# Altium PCB Layout_Power_Supply_V3.PcbDoc
Units mm, origin at the board's own origin, x right, y up, seen from the top; angles counter-clockwise.
Board outline 24.89 x 34.29 mm, 2 copper layers (Top Layer, Bottom Layer); 26 components, 17 nets, 78 pads, 18 vias.
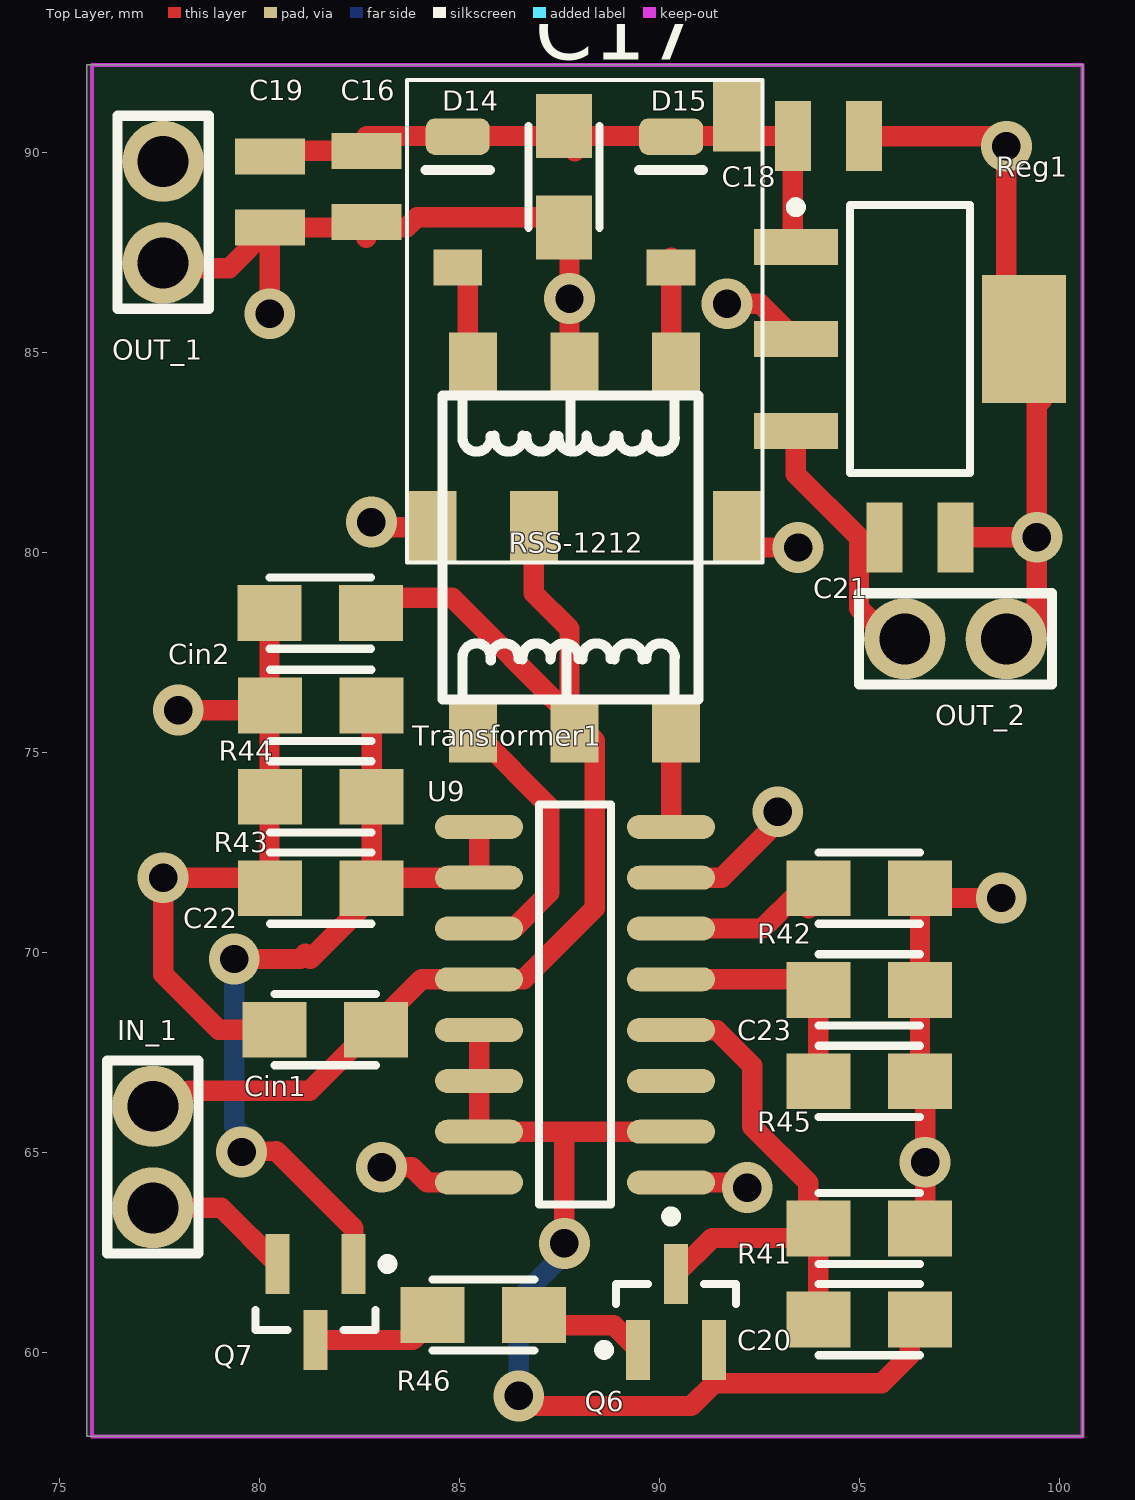
[diagram p0: Top Layer view]
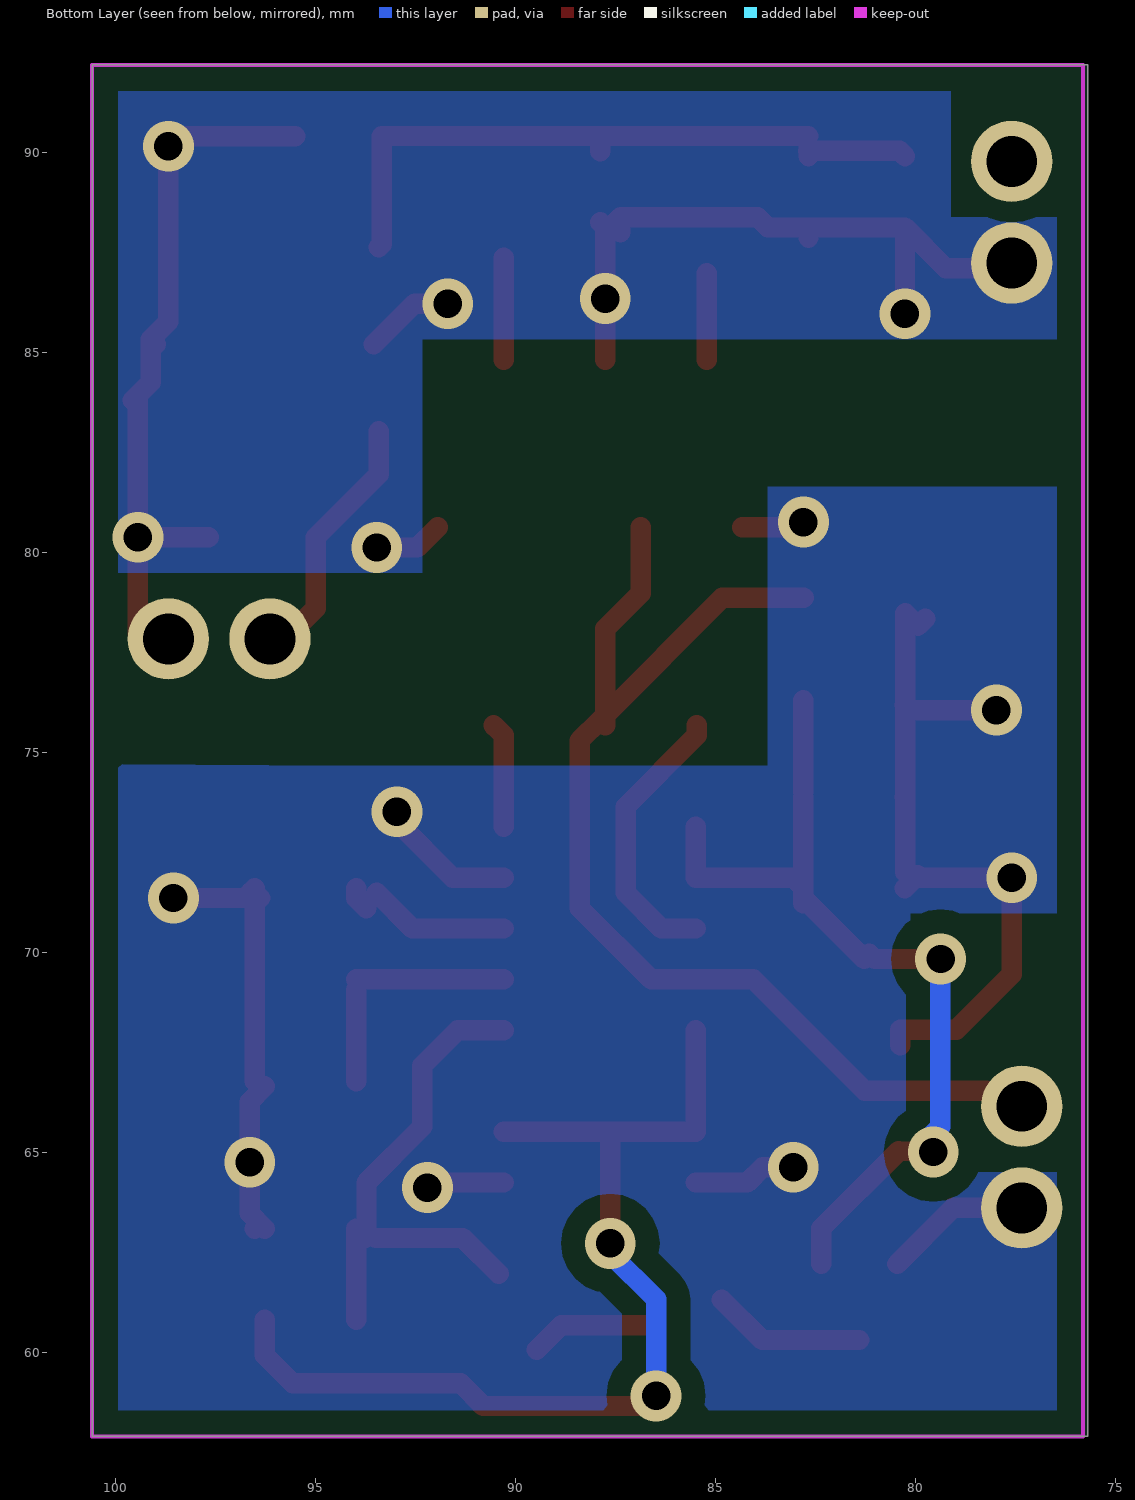
[diagram p1: Bottom Layer view, seen from below]

## Layer stack, top to bottom
Top Solder: solder mask 0.0102, Solder Resist, Dk 3.5
Top Layer: signal copper 0.0356
Dielectric 1: dielectric 0.32, FR-4, Dk 4.8
Bottom Layer: signal copper 0.0356
Bottom Solder: solder mask 0.0102, Solder Resist, Dk 3.5

## Board outline
75.692,57.912 100.584,57.912 100.584,92.202 75.692,92.202

## Design rules (kind name [scope] priority, off if disabled: settings)
Clearance Inversor_test [All] p1: gap=0.254
Clearance [All] p2: gap=0.256 except(0.5: THPad-Poly; 0.6: Track-Poly Via-Poly)
PlaneClearance PlaneClearance_1 [All] p1: clearance=1
PlaneClearance [InNet('GND_IN') And OnLayer('Bottom Layer')] p2: clearance=1
PlaneConnect [All] p1: planeconnectstyle=Direct reliefexpansion=0.508 reliefentries=4 reliefconductorwidth=0.254 reliefairgap=0.254
PolygonConnect [All] p1: connectstyle=Direct reliefconductorwidth=0.254 reliefentries=4 polygonreliefangle="90 Angle" airgapwidth=0.254
RoomDefinition Conectors_IsolatedSupply [InComponentClass('Conectors_IsolatedSupply')] p1: confinementstyle=ConfineIn formatcopy=TRUE lockcomponents=FALSE outline 0,25.654 371.602,25.654 371.602,217.687 0,217.687
RoomDefinition isolatedSupply [InComponentClass('isolatedSupply')] p2: confinementstyle=ConfineIn formatcopy=TRUE lockcomponents=FALSE outline 26.035,26.162 332.994,26.162 332.994,126.873 26.035,126.873
RoutingVias [All] p1: holewidth=0.711 width=1.27 viastyle="Through Hole" minholewidth=0.711 minwidth=1.27 maxholewidth=0.711 maxwidth=1.27
SolderMaskExpansion [All] p1: expansion=0.102
Width [All] p1: maxlimit=0.52 minlimit=0.5 preferedwidth=0.51 minimp=50.000000 maximp=50.000000 favimp=50.000000
28 further rules are at their usual default settings.

## Classes and differential pairs
component class Conectors_IsolatedSupply: IN_1 OUT_1 OUT_2

## Components (designator, comment, footprint, x,y, rotation, side; value= is the part's Value field where it differs from the comment)
C16 "Capacitor_nao_polarizado" "Capacitor SMD - 0806" 82.686,89.161 r270 top
C17 "Capacitor_nao_polarizado" 0805_W 87.63,89.408 r270 top
C18 "Capacitor_nao_polarizado" "Capacitor SMD - 0806" 94.233,90.424 r0 top
C19 "Capacitor_nao_polarizado" "Capacitor SMD - 0806" 80.264,89.028 r270 top
C20 "Cap_0805" 0805_W 95.257,60.824 r180 top
C21 "Capacitor_nao_polarizado" "Capacitor SMD - 0806" 96.52,80.391 r0 top
C22 "Cap_0805" 0805_W 81.534,71.628 r0 top
C23 "Cap_0805" 0805_W 95.243,69.088 r0 top
Cin1 "Cap_0805" 0805_W 81.661,68.072 r180 top
Cin2 "Cap_0805" 0805_W 81.534,78.486 r180 top
D14 "B2-SMD" SOD-123 84.963,88.773 r90 top
D15 "B2-smd" SOD-123 90.297,88.773 r90 top
IN_1 "Header 2" Header2 77.343,63.627 r90 top
OUT_1 "Header 2" Header2 77.597,87.249 r90 top
OUT_2 "Header 2" Header2 98.679,77.851 r180 top
Q6 "BC857" SOT-23-TT3_N 90.424,61.026 r90 top
Q7 "BC847" SOT-23-TT3_N 81.407,61.275 r270 top
R41 "Res_0805" 0805_W 95.257,63.1 r180 top
R42 "Res_0805" 0805_W 95.257,71.609 r180 top
R43 "Res_0805" 0805_W 81.534,73.914 r0 top
R44 "Res_0805" 0805_W 81.534,76.2 r0 top
R45 "Res_0805" 0805_W 95.257,66.783 r180 top
R46 "Res_0805" 0805_W 85.598,60.96 r0 top
Reg1 "LM7805" SOT223 96.266,85.344 r0 top
Transformer1 "WE-PP" Trafo 87.884,80.137 r90 top
U9 "TL494ID" SOIC16_N 87.897,68.707 r180 top

## Footprints (in the part's own frame and the unit in brackets; to place one, negate y for a bottom-side part, rotate by r counter-clockwise, add the part's x,y. Pads: shape width x height; smd on the part's side, far side on the other; paste and mask are expansions set on the pad)
0805_W [mm]
  rect 1.6x1.397 smd: 1(-1.263,-0.009) 2(1.277,-0.009)
  silkscreen extent -1.26,-0.9 1.28,0.88
"Capacitor SMD - 0806" [mm] "0806 - Soldar"
  rect 0.9x1.75 smd: 1(-0.89,0) 2(0.89,0)
  body extent -1.08,-0.67 1.07,0.67, height 0.55
Header2 [mil]
  round 80 hole 50: 1(0,0) 2(100,0)
  silkscreen extent -45,-45 145,45
SOD-123 [mm] "Diodo"
  rect 0.91x1.22 smd: 1(-1.635,0)
  rrect50% 0.91x1.6 smd: 2(1.635,0)
  silkscreen extent 0.8,-0.8 0.8,0.8
SOIC16_N [mm] "SOIC, 16-Leads, Body 9.9x3.9mm, Pitch 1.27mm, IPC Medium Density"
  oval 2.2x0.6 smd: 1(-2.4,4.445) 2(-2.4,3.175) 3(-2.4,1.905) 4(-2.4,0.635) 5(-2.4,-0.635) 6(-2.4,-1.905) 7(-2.4,-3.175) 8(-2.4,-4.445) 9(2.4,-4.445) 10(2.4,-3.175) 11(2.4,-1.905) 12(2.4,-0.635) 13(2.4,0.635) 14(2.4,1.905) 15(2.4,3.175) 16(2.4,4.445)
  silkscreen extent -2.53,-5 0.9,5.42, body extent -2,-5 2,5, height 1.91
SOT223 [mm] "large"
  rect 2.1x0.9 smd: 1(-2.85,0) 2(-2.85,-2.3) 3(-2.85,2.3)
  rect 2.1x3.2 smd: 1(2.85,0)
  silkscreen extent -2.97,-3.35 1.5,3.42, body extent -1.85,-3.35 1.85,3.35, height 1.7
SOT-23-TT3_N [mm] "SOT23, 3-Leads, Body 2.9x1.3mm, Pitch 0.95mm, Lead Span 2.4mm, IPC Medium Density"
  rect 1.5x0.6 smd: 1(-0.95,0.95) 2(-0.95,-0.95) 3(0.95,0)
  silkscreen extent -1.07,-1.5 0.7,1.92, body extent -0.7,-1.5 0.7,1.5, height 1.12
Trafo [mm] "transformador smd TI"
  rect 1.6x1.2 smd: 1(-4.57,2.54) 2(-4.57,0) 3(-4.57,-2.54) 4(4.57,-2.54) 5(4.57,0) 6(4.57,2.54)
  silkscreen extent -3.8,-3.1 3.8,3.3

## Part data
C16 C17 C18 C19 C21: "Capacitor nao polarizado"
C20 C22 C23 Cin1 Cin2: "Capacitor"
D14 D15: library part Schottky, "Diodo Schottky"
IN_1 OUT_1 OUT_2: "Header, 2-Pin"
Q6: "PNP General-purpose Transistor"
Q7: "NPN General-purpose Transistor"
R41 R42 R43 R44 R45 R46: "Resistor"
Transformer1: library part Trafo-TI
U9: "Pulse-Width-Modulation Control Circuit"

## Free pads (board coordinates)
  rect 1.2x1.8 smd: 2(91.948,90.932) 3(91.948,80.645) 4(86.868,80.645) 5(84.328,80.645)

## Via types
v1: diameter 1.27, hole 0.711, Top Layer to Bottom Layer, 18 vias

## Nets (pads, with @x,y where several pads share a name; then routed paths per layer and width w, separated by ;. In a path a pad name is that pad's centre, name@x,y a point inside that pad or via, vN(x,y) a via of type N, cw(c..) or ccw(c..) an arc to the next point about the centre after c; other vN are vias at no path point)
5V_REF: C20.1 Q6.2 U9.2 U9.13 U9.14 U9.15 | length 25
  Top Layer w0.51: U9.13 U9.14 U9.15 87.63,65.532 ; v1(86.487,58.928) 86.487,58.801 86.614,58.674 90.805,58.674 91.374,59.243 95.565,59.243 96.266,59.944 C20.1@96.266,60.833 ; v1@87.63,63.246 87.63,65.532 ; U9.2 87.63,65.532
  Bottom Layer w0.51: v1(86.487,58.928) 86.487,61.341 v1@87.63,62.484
  other v1: 87.63,62.738
+5V_ISO: C21.1 OUT_2.2 Reg1.2 | length 6.9
  Top Layer w0.51: Reg1.2 93.416,81.969 94.994,80.391 94.994,78.615 OUT_2.2@96.266,77.343
CT: C23.1 R45.2 U9.5 | length 6
  Top Layer w0.51: U9.5 C23.1@93.98,69.342 ; R45.2 C23.1
DT_CON: C20.2 Q6.3 R41.2 U9.4 | length 13.1
  Top Layer w0.51: U9.4 91.44,68.072 92.329,67.183 92.329,65.659 93.726,64.262 R41.2@93.726,63.11 ; Q6.3 91.322,62.874 R41.2@93.491,62.874 ; R41.2@93.745,62.874 R41.2 C20.2
FEEDBACK: U9.3
GND_IN: C22.1 C23.2 Cin1.2 Cin2.2 IN_1.1 pad.5 Q7.2 R41.1 R42.1 R43.1 R44.1 R45.1 U9.1 U9.7 U9.16 | length 42.4
  Top Layer w0.51: IN_1.1@77.851,63.627 79.055,63.627 Q7.2 ; v1(77.978,76.073) 80.153,76.073 R44.1@80.257,76.177 ; Cin2.2@79.756,78.359 79.938,78.177 Cin2.2 R44.1@80.257,76.177 ; C22.1@80.257,72.016 R43.1@80.257,73.914 ; C22.1 79.945,71.944 79.883,71.882 v1(77.597,71.882) 77.597,69.469 78.985,68.081 Cin1.2 Cin1.2@80.384,67.698 ; R43.1 80.261,73.914 R43.1@80.257,73.914 ; R44.1 R44.1@80.257,76.177 ; v1(82.804,80.772) 82.931,80.645 pad.5 ; v1(83.058,64.643) 83.82,64.643 84.201,64.262 U9.16 ; U9.1 92.075,64.262 v1(92.202,64.135) ; U9.7 91.567,71.882 92.964,73.279 v1(92.964,73.533) ; R41.1@96.266,63.11 96.647,63.491 v1(96.647,64.77) 96.647,66.285 R45.1@96.266,66.666 ; R42.1@96.384,71.374 R42.1@96.52,71.374 ; R41.1@96.511,63.119 R41.1 ; R45.1 C23.2 R42.1@96.52,71.374 ; R42.1@96.638,71.501 R42.1 R42.1@96.52,71.374 ; v1(98.552,71.374) R42.1@96.52,71.374 ; R43.1@80.257,73.914 R44.1@80.257,76.177
I_FB: C22.2 Q7.1 R43.2 R44.2 U9.9 U9.10 | length 22.5
  Top Layer w0.51: v1(79.375,69.85) 81.026,69.85 81.153,69.977 81.28,69.85 C22.2@82.804,71.374 ; v1(79.558,65.024) 80.422,65.05 82.357,63.114 Q7.1 ; C22.2@82.804,71.247 C22.2@82.804,71.374 ; R43.2 82.811,71.889 C22.2@82.804,71.882 ; R43.2@82.811,74.032 R44.2 R44.2@82.811,76.318 ; C22.2@82.931,71.755 C22.2@82.804,71.882 ; C22.2@82.931,71.882 U9.10 U9.9 ; C22.2@82.804,71.374 C22.2@82.804,71.882
  Bottom Layer w0.51: v1(79.375,69.85) 79.378,69.847 79.378,65.656 79.558,65.476 v1(79.558,65.024)
NetC16_1: C16.1 C17.1 C18.1 C19.1 D14.2 D15.2 pad.2 Reg1.3 | length 16.5
  Top Layer w0.51: C19.1 80.397,90.051 C16.1@82.677,90.051 ; C16.1@82.677,89.918 C16.1@82.677,90.051 ; C16.1@82.677,90.17 C16.1@82.677,90.051 ; C16.1 C16.1@82.677,90.051 ; C16.1@82.686,90.424 C18.1 93.343,87.717 Reg1.3 ; C17.1@87.884,90.044 C17.1@87.884,90.298
NetC16_2: C16.2 C17.2 C18.2 C19.2 C21.2 OUT_1.1 OUT_2.1 pad.3 Reg1.1 Transformer1.5 | length 39.6
  Top Layer w0.51: OUT_1.1@77.343,87.122 79.248,87.122 C19.2 ; v1(80.264,85.979) C19.2 ; C16.2@82.677,87.884 C16.2@82.677,88.138 ; C17.2@87.376,88.011 C17.2@87.376,88.264 ; C17.2@87.503,88.265 87.376,88.392 83.947,88.392 83.693,88.138 C16.2@82.677,88.138 ; Transformer1.5@87.757,84.834 v1(87.757,86.36) 87.757,88.137 C17.2@87.884,88.264 ; v1(91.694,86.233) 92.527,86.233 93.416,85.344 Reg1.1@93.543,85.217 ; pad.3 92.456,80.137 v1(93.472,80.137) ; C18.2@95.51,90.415 98.434,90.415 v1(98.679,90.17) 98.679,85.781 Reg1.1@99.116,85.344 ; C21.2@97.663,80.391 v1(99.441,80.391) ; OUT_2.1@98.806,77.343 99.441,77.978 v1(99.441,80.391) ; Reg1.1@98.989,85.217 Reg1.1@99.116,85.344 ; Reg1.1@99.441,83.82 v1(99.441,80.391) ; Reg1.1@99.568,83.82 99.116,84.272 Reg1.1@99.116,85.344 ; C19.2 C16.2@82.677,88.138
NetD14_1: D14.1 Transformer1.6 | length 2.2
  Top Layer w0.51: Transformer1.6@85.217,84.834 D14.1@85.217,86.995
NetD15_1: D15.1 Transformer1.4 | length 2.5
  Top Layer w0.51: Transformer1.4@90.297,84.834 D15.1 D15.1@90.297,87.376
NetQ6_1: Q6.1 R46.2 | length 3
  Top Layer w0.51: R46.2@86.741,60.69 88.86,60.69 Q6.1
NetQ7_3: Q7.3 R46.1 | length 3.9
  Top Layer w0.51: Q7.3 83.836,60.325 R46.1@84.843,61.332
NetR42_2: R42.2 U9.6 | length 4.1
  Top Layer w0.51: U9.6 92.583,70.612 R42.2@93.472,71.501 ; R42.2@93.735,71.12 93.98,71.365 R42.2
NetTransformer1_1: Transformer1.1 U9.11 | length 7
  Top Layer w0.51: Transformer1.1@85.471,75.694 85.471,75.438 87.249,73.66 87.249,71.501 86.36,70.612 U9.11
NetTransformer1_3: Transformer1.3 U9.8 | length 2.6
  Top Layer w0.51: U9.8 90.297,75.44 Transformer1.3 Transformer1.3@90.551,75.694
VIN: Cin1.1 Cin2.1 IN_1.2 pad.4 Transformer1.2 U9.12 | length 29
  Top Layer w0.51: IN_1.2@77.851,66.167 78.235,66.551 81.267,66.551 84.058,69.342 U9.12 86.614,69.342 88.392,71.12 88.392,75.313 Transformer1.2@87.884,75.821 ; Cin2.1@82.797,78.876 84.829,78.876 Transformer1.2@87.757,75.948 ; pad.4 86.868,78.994 87.757,78.105 Transformer1.2@87.757,75.948 ; Transformer1.2@87.757,75.694 Transformer1.2@87.757,75.948
pads on no net: OUT_1.2

## Polygon pours and split planes (outlines as drawn)
GND_IN on Bottom Layer "Bottom Layer-GND_IN" (solid, pour order 0): 75.945,57.912 100.457,57.912 100.457,74.724 94.34,74.677 83.693,74.677 83.693,81.661 75.945,81.661 75.945,70.993 80.137,70.993 80.137,64.516 75.945,64.516
NetC16_2 on Bottom Layer "Bottom Layer-GND_IN" (solid, pour order 2): 75.692,85.344 92.329,85.344 92.329,79.502 100.457,79.502 100.457,92.075 79.121,92.202 79.121,88.392 75.692,88.392

## Keep-outs
Keep-Out Layer:
  lines w0.1: 75.819,57.912 75.819,92.202 100.584,92.202 100.584,57.912 75.819,57.912

## Silkscreen, mask and mechanical layers (free items; w line width, h text height)
Top Overlay:
  lines w0.1: 83.693,79.756 92.583,79.756 92.583,91.821 83.693,91.821 83.693,79.756
  text "RSS-1212" at 86.233,80.01 h0.5